# EAGLE board itead (EAGLE 6.6.0), part 1 of 2
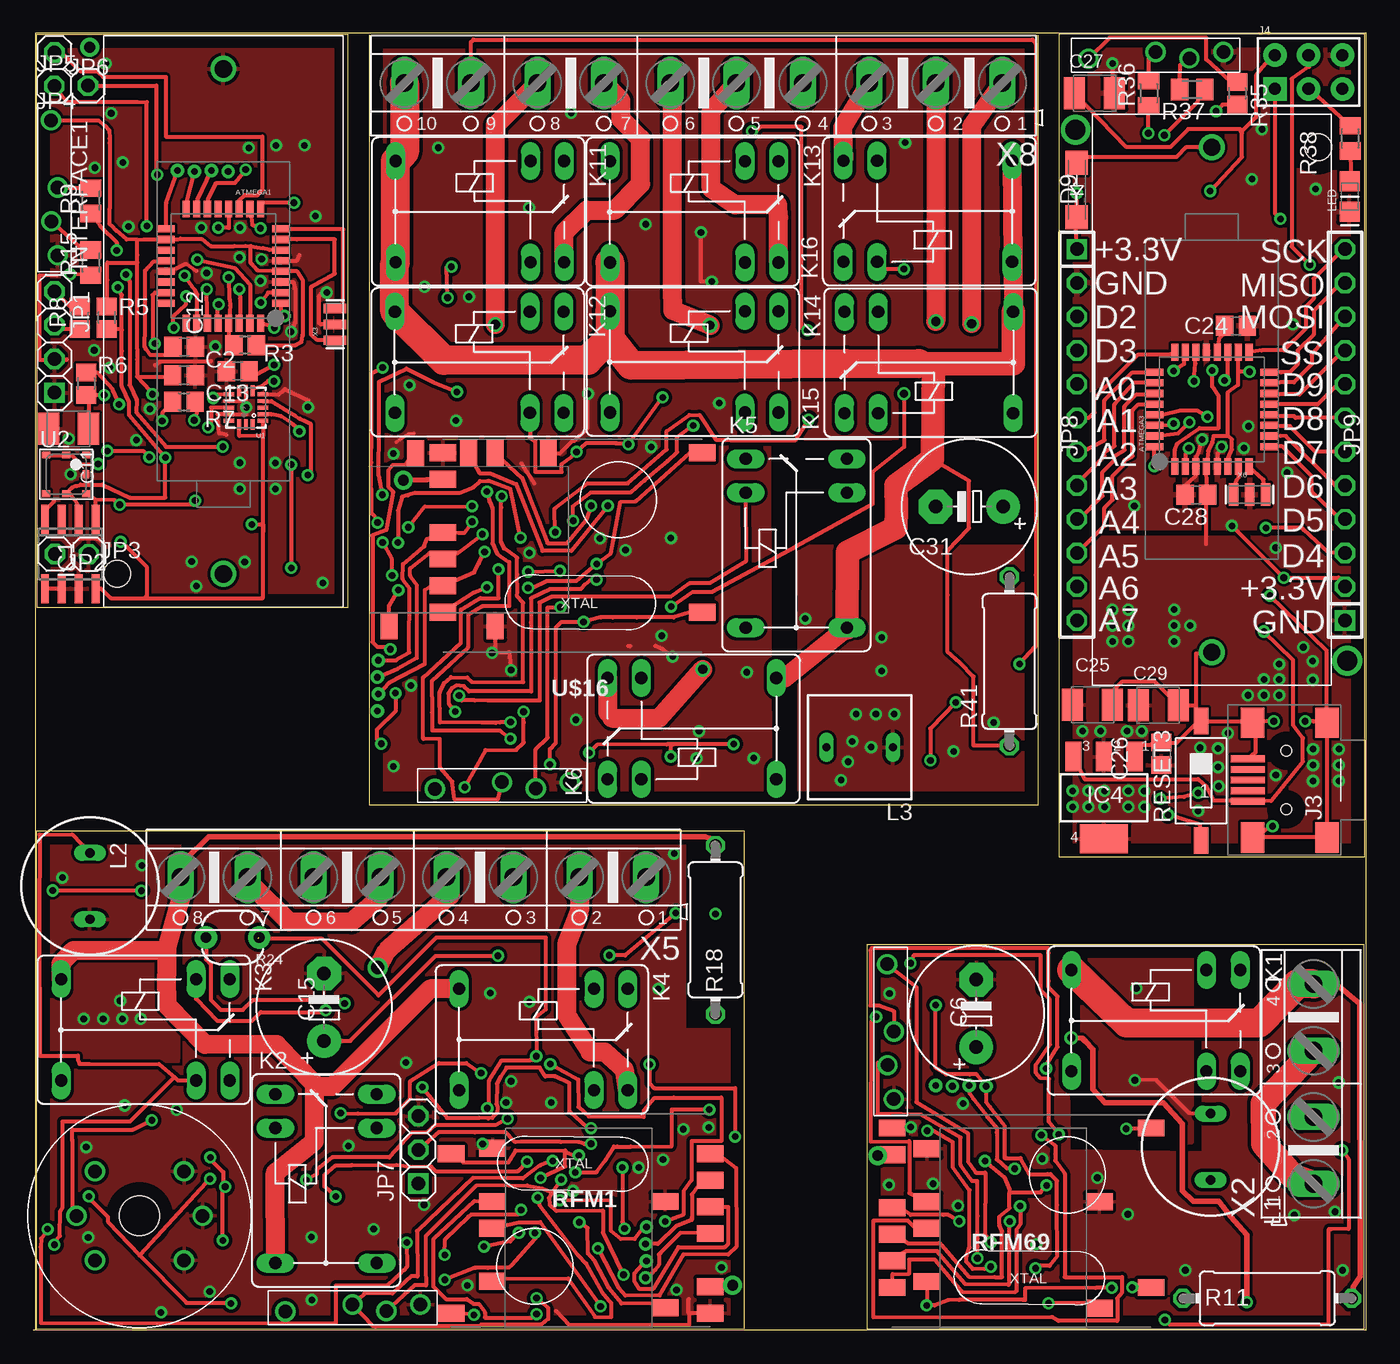
[diagram p0: board, top side]
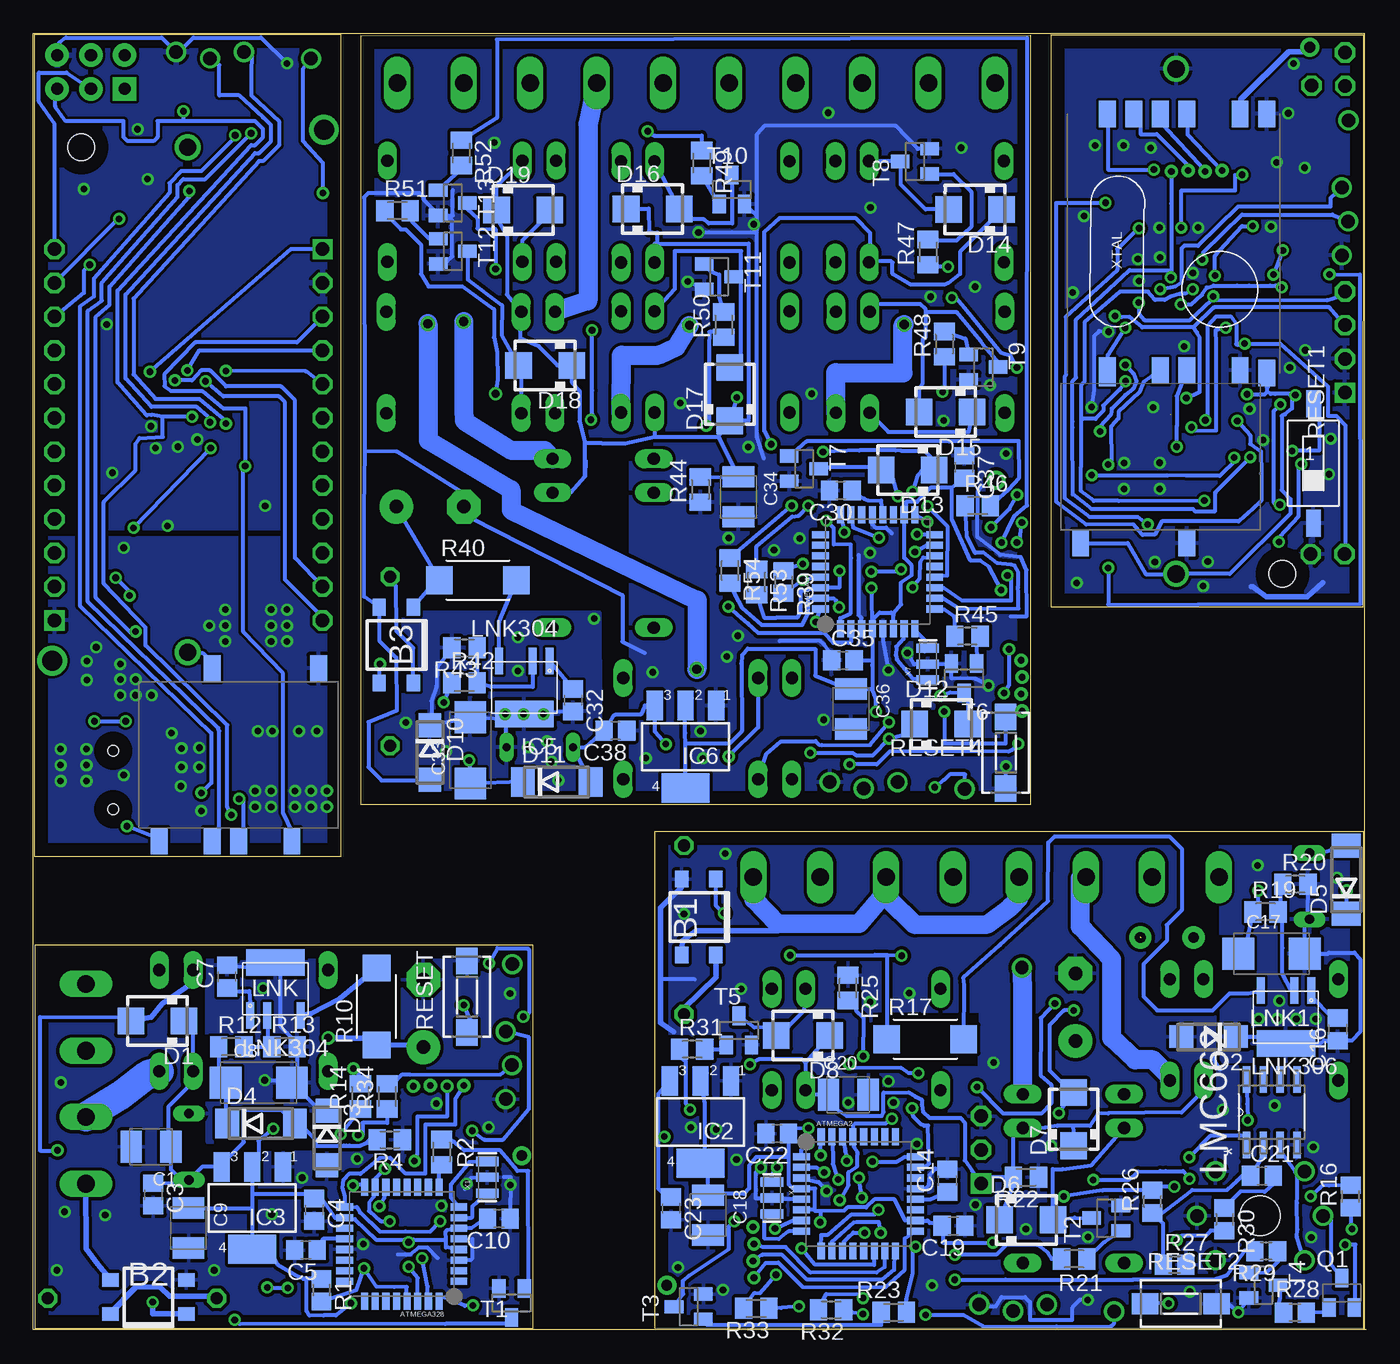
[diagram p1: board, bottom side, seen from below]

Size 100.36 x 97.58 mm. Coordinates in mm from the lower left corner, seen from the top.
Outline: 0,0 0.13,0
Outline: 0.13,0 100.36,0 100.36,97.57 0.13,97.57 0.13,0
Outline: 100.2,0.1 100.2,28.98 62.75,28.98 62.75,0.1 100.2,0.1
Outline: 23.7,97.47 0.25,97.45 0.25,54.38 23.7,54.38 23.7,60.45 23.72,70.61 23.7,97.47
Outline: 53.54,37.51 0.21,37.51 0.21,0.09 53.54,0.11 53.54,37.51
Outline: 77.2,35.6 100.25,35.6 100.25,97.5 77.2,97.5 77.2,35.6
Outline: 75.67,39.53 75.67,97.38 25.29,97.43 25.27,39.53 75.67,39.53
Copper layers (1*16): Top 0.035mm / dielectric 1.5mm / Bottom 0.035mm
Design rules "default": minimum track width 10mil, minimum drill 24mil, track to track 8mil, track to pad 8mil, pad to pad 8mil, via to via 8mil, smd to smd 8mil, copper to edge 40mil, drill to drill 8mil, minimum pad ring 10mil, minimum via ring 8mil, stop-mask expansion 4mil, vias tented up to drill 0mil, thermal gap 10mil
Net classes: 1 power: width 0.381 mm, clearance 0.254 mm; 2 220V: width 0.381 mm, clearance 0.508 mm

## Footprints (pad centres in the part's own frame; a part is rotated, then mirrored left to right if it is on the bottom)
TQFP32-08 = smd 1.27 x 0.533: 1 -4.293,2.8; 2 -4.293,2; 3 -4.293,1.2; 4 -4.293,0.4; 5 -4.293,-0.4; 6 -4.293,-1.2; 7 -4.293,-2; 8 -4.293,-2.8; 17 4.293,-2.8; 18 4.293,-2; 19 4.293,-1.2; 20 4.293,-0.4; 21 4.293,0.4; 22 4.293,1.2; 23 4.293,2; 24 4.293,2.8 | smd 0.533 x 1.27: 9 -2.8,-4.293; 10 -2,-4.293; 11 -1.2,-4.293; 12 -0.4,-4.293; 13 0.4,-4.293; 14 1.2,-4.293; 15 2,-4.293; 16 2.8,-4.293; 25 2.8,4.293; 26 2,4.293; 27 1.2,4.293; 28 0.4,4.293; 29 -0.4,4.293; 30 -1.2,4.293; 31 -2,4.293; 32 -2.8,4.293
TO-269AA = smd 1 x 1.25: + -1.28,-2.855; - 1.28,-2.855; AC1 -1.28,2.855; AC2 1.28,2.855
SMC_B = smd 1.6 x 2.4: + -1.5,0; - 1.5,0
C2012 = smd 1.3 x 1.5: 1 -0.85,0; 2 0.85,0
E5-10,5 = drill 1.016 pad 2.54: + -2.54,0 | drill 1.016 pad 2.54 octagon: - 2.54,0
SMC_C = smd 2.4 x 2.4: + -2.5,0; - 2.5,0
SMA = smd 2 x 2: A 2,0; C -2,0
DO214AC = smd 1.8 x 1.7: A 2.05,0; C -2.05,0
DO214AA = smd 1.8 x 2.2: A 2.55,0; C -2.55,0
SMA-DO214AC = smd 1.8 x 1.7: A -2.05,0; K 2.05,0
SO08 = smd 0.6 x 2.2: 1 -1.905,-2.6; 2 -0.635,-2.6; 3 0.635,-2.6; 4 1.905,-2.6; 5 1.905,2.6; 6 0.635,2.6; 7 -0.635,2.6; 8 -1.905,2.6
SOT223 = smd 1.219 x 2.235: 1 -2.311,-3.099; 2 0,-3.099; 3 2.311,-3.099 | smd 3.6 x 2.2: 4 0,3.099
SO-8C = smd 0.6 x 2: BP -1.905,-2; D 1.905,-2; FB -0.635,-2 | smd 4.41 x 2: S 0,2
PINHD1X05-SQUARE = drill 1.016: 1 -5.061,-0.269; 3 0,0.24; 4 2.54,-0.24; 5 5.099,0.24
USB-MINI-B_2 = smd 0.508 x 2.54: 1 0,0; 2 0.8,0; 3 1.6,0; 4 2.4,0; 5 3.2,0 | smd 2.286 x 1.778: 6 -2.717,5.948; 7 -2.717,0.36; 8 5.918,0.36; 9 5.918,5.948 | hole 0.813: -0.6,2.9; 3.8,2.9
HEAD3X2 = drill 0.914 pad 1.778 square: 1 0,0 | drill 0.914 pad 1.778: 2 0,2.54; 3 2.54,0; 4 2.54,2.54; 5 5.08,0; 6 5.08,2.54
1X04-S = drill 1.016 square: 1 -3.81,0 | drill 1.016 octagon: 2 -1.27,0; 3 1.27,0; 4 3.81,0
1X01 = drill 1.016 octagon: 1 0,0
1X03-S = drill 1.016 square: 1 -2.54,0 | drill 1.016 octagon: 2 0,0; 3 2.54,0
1X12 = drill 1.016 square: 1 -13.97,0 | drill 1.016 octagon: 2 -11.43,0; 3 -8.89,0; 4 -6.35,0; 5 -3.81,0; 6 -1.27,0; 7 1.27,0; 8 3.81,0; 9 6.35,0; 10 8.89,0; 11 11.43,0; 12 13.97,0
FRS1B = drill 0.914 long: 1 0,3.81; 2 0,-3.81; O -2.54,-3.81; P 10.16,3.81; P@ 10.16,-3.81; S -2.54,3.81
BS11 = drill 0.7 long: 1 -2.5,0; 2 2.5,0
SD8 = drill 0.6 long: 1 -2.5,0; 2 2.5,0
LED0805 = smd 1.524 x 1.524: 1 0,0; 2 2.286,0
SOIC127P600X175-8N = smd 1.981 x 0.559: 1 -2.464,1.905; 2 -2.464,0.635; 3 -2.464,-0.635; 4 -2.464,-1.905; 5 2.464,-1.905; 6 2.464,-0.635; 7 2.464,0.635; 8 2.464,1.905
SOT23-BEC = smd 1 x 1.4: B -0.95,-1.1; C 0,1.1; E 0.95,-1.1
R2012 = smd 1.3 x 1.5: 1 -0.85,0; 2 0.85,0
M2012 = smd 1.3 x 1.6: 1 -0.95,0; 2 0.95,0
R2512W = smd 2 x 2.1: 1 -2.896,0; 2 2.896,0
0411/12 = drill 0.914 octagon: 1 -6.35,0; 2 6.35,0
PHOTOCELL = drill 0.8 pad 1.676: 1 -2,0; 2 2,0
DTSM-3 = smd 2 x 1.6: 1 -2.7,0; 2 2.7,0
SMS-001 = smd 1.092 x 2.007: 1 0,-4.496; 2 0,4.496
RFM69W = smd 2 x 1.27: ANA 9.27,-5; DIO0 -10.23,5; GND 9.27,-7; MISO 9.27,1; MOSI 9.27,3; NSS 9.27,5; SCK 9.27,-1; VDD -10.23,-7
SOT23 = smd 1 x 1.4: 1 -0.95,-1.1; 2 0.95,-1.1; 3 0,1.1
QFN-16_0.5MM = smd 0.8 x 0.3: 1 -1.275,1; 2 -1.275,0.5; 3 -1.275,0; 4 -1.275,-0.5; 5 -1.275,-1; 9 1.275,-1; 10 1.275,-0.5; 11 1.275,0; 12 1.275,0.5; 13 1.275,1 | smd 0.3 x 0.8: 6 -0.5,-1.275; 7 0,-1.275; 8 0.5,-1.275; 14 0.5,1.275; 15 0,1.275; 16 -0.5,1.275
BMP180 = smd 0.6 x 0.5: 1 1.5,1.45; 2 0,1.45; 3 -1.5,1.45; 4 -1.5,-1.45; 5 0,-1.45; 6 1.5,-1.45 | smd 0.5 x 0.6: 7 1.5,0
RFM12B-ANTENNA = drill 0.8 pad 1.422: P$1 0,0
AVRHEADER = drill 0.5: CLK 2.54,0; MISO 1.27,0.07; MOSI 0,0; VPP -1.27,0.072
KEYSTONE-2/3A = drill 1.3: +VE 0,19; -VE 0,-19 | hole 2: 8,19
ESP03 = smd 1.27 x 2: WIFI_EN 3.27,-6; WIFI_GND -6.73,-6; WIFI_GPIO15 -2.73,7; WIFI_RX -0.73,-6; WIFI_TX -2.73,-6; WIFI_VDD 5.27,7
MQ-3 = drill 1.016: A1 -3.35,3.35; A2 -3.35,-3.35; B1 3.35,3.35; B2 3.35,-3.35; HA -4.75,0; HB 4.75,0 | hole 3: 0,0
RFM69W-MINPADS = smd 2 x 1.27: ANA 8,-5; DIO0 -11.5,5; GND 8,-7; MISO 8,1; MOSI 8,3; NSS 8,5; SCK 8,-1; VDD -11.5,-7
RESONATOR-SMD = smd 0.7 x 1.7: 1 -1.2,0; 2 0,0; 3 1.2,0
AK500/4 = drill 1.321 long: 1 -7.518,0; 2 -2.489,0; 3 2.489,0; 4 7.518,0
AK500/8 = drill 1.321 long: 1 -17.526,0; 2 -12.497,0; 3 -7.518,0; 4 -2.489,0; 5 2.489,0; 6 7.518,0; 7 12.497,0; 8 17.526,0
AK500/10 = drill 1.321 long: 1 -22.504,0; 2 -17.501,0; 3 -12.497,0; 4 -7.493,0; 5 -2.489,0; 6 2.489,0; 7 7.493,0; 8 12.497,0; 9 17.501,0; 10 22.504,0

## Placement (x,y rotation side)
ATMEGA1  ATMega-328  [TQFP32-08]  14.32,80.05 180 top
ATMEGA2  ATMega-328  [TQFP32-08]  38.23,10.23 0 bottom
ATMEGA3  ATMega-328  [TQFP32-08]  88.73,69.26 90 top
ATMEGA4  ATMega-328  [TQFP32-08]  36.79,57.04 90 bottom
ATMEGA328  ATMega-328  [TQFP32-08]  72.61,6.45 180 bottom
B1  RECT  [TO-269AA]  50.26,31.07 180 bottom
B2  RECT  [TO-269AA]  91.68,2.48 90 bottom
B3  RECTIFIER  [TO-269AA]  73.03,51.52 180 bottom
C1  100uF  [SMC_B]  91.48,13.77 180 bottom
C2  100nF  [C2012]  11.36,71.84 0 top
C3  0.1  [C2012]  91.31,10.19 270 bottom
C4  0.1  [C2012]  79.19,9.03 270 bottom
C5  0.1  [C2012]  79.83,6.01 180 bottom
C6  3,3uF  [E5-10,5]  70.99,23.81 90 top
C7  100nF  [C2012]  85.76,26.58 90 bottom
C8  22uF / 16 V  [SMC_C]  83.38,18.59 0 bottom
C9  100uF  [SMC_B]  88.67,7.66 270 bottom
C10  100nF  [C2012]  65.31,8.37 180 bottom
C11  100uF  [SMC_B]  2.66,67.8 180 top
C12  0.1  [C2012]  11.37,73.97 0 top
C13  100nF  [C2012]  15.4,72.14 180 top
C14  100nF  [C2012]  31.53,11.23 90 bottom
C15  3,3uF  [E5-10,5]  21.89,24.28 90 top
C16  100nF  [C2012]  2.15,22.61 270 bottom
C17  22uF / 16 V  [SMC_C]  7.13,28.3 0 bottom
C18  100uF  [SMC_B]  49.57,8.63 270 bottom
C19  100nF  [C2012]  31.07,7.83 180 bottom
C20  100uF  [SMC_B]  38.99,17.69 0 bottom
C21  100nF  [C2012]  7.86,11.59 0 bottom
C22  100nF  [C2012]  44.35,14.77 180 bottom
C23  100nF  [C2012]  52.33,9.14 270 bottom
C24  0.1  [C2012]  90.54,75.56 0 top
C25  100uF  [SMC_B]  79.74,47.03 0 top
C26  100nF  [C2012]  84.94,43.35 270 top
C27  100uF  [SMC_B]  79.89,93.07 0 top
C28  0.1  [C2012]  87.56,62.84 180 top
C29  100uF  [SMC_B]  84.7,47 0 top
C30  0.1  [C2012]  39.56,63.16 180 bottom
C31  3,3uF  [E5-10,5]  70.48,61.95 180 top
C32  100nF  [C2012]  59.71,47.38 270 bottom
C33  22uF / 16 V  [SMC_C]  67.45,43.61 90 bottom
C34  100uF  [SMC_B]  47.26,62.69 270 bottom
C35  100nF  [C2012]  39.4,50.38 0 bottom
C36  100uF  [SMC_B]  38.81,46.72 270 bottom
C37  100nF  [C2012]  30.27,64.93 270 bottom
C38  100nF  [C2012]  56.53,45.09 180 bottom
D1  MBRA340T3  [SMA]  91.01,23.24 180 bottom
D2  ES1D  [DO214AC]  11.87,22.06 180 bottom
D3  ES1D  [DO214AC]  78.26,14.44 270 bottom
D4  1N4007GP  [DO214AA]  83.21,15.53 0 bottom
D5  1N4007GP  [DO214AA]  1.5,33.87 90 bottom
D6  MBRA340T3  [SMA]  25.59,8.28 0 bottom
D7  MBRA340T3  [SMA]  22.03,15.85 90 bottom
D8  MBRA340T3  [SMA]  42.41,22.16 180 bottom
D9  GF1  [SMA-DO214AC]  78.56,85.79 270 top
D10  ES1D  [DO214AC]  70.51,43.44 270 bottom
D11  1N4007GP  [DO214AA]  60.95,41.23 0 bottom
D12  MBRA340T3  [SMA]  31.99,45.58 0 bottom
D13  MBRA340T3  [SMA]  34.52,64.71 180 bottom
D14  MBRA340T3  [SMA]  29.45,84.31 180 bottom
D15  MBRA340T3  [SMA]  31.67,69.06 180 bottom
D16  MBRA340T3  [SMA]  53.73,84.35 0 bottom
D17  MBRA340T3  [SMA]  47.92,70.41 90 bottom
D18  MBRA340T3  [SMA]  61.82,72.58 180 bottom
D19  MBRA340T3  [SMA]  63.48,84.27 0 bottom
IC1  LM75AD  [SO08]  2.79,58.38 180 top
IC2  MC33269ST-3.3T3  [SOT223]  50.13,15.63 180 bottom
IC3  MC33269ST-3.3T3  [SOT223]  83.87,9.16 180 bottom
IC4  MC33269ST-3.3T3  [SOT223]  80.61,40.05 180 top
IC5  LNK304  [SO-8C]  63.39,48.33 180 bottom
IC6  MC33269ST-3.3T3  [SOT223]  51.25,43.88 180 bottom
INTERFACE  PINHD1X5SQUARE  [PINHD1X05-SQUARE]  64.55,22.46 270 top
INTERFACE1  PINHD1X5SQUARE  [PINHD1X05-SQUARE]  1.6,85.96 270 top
INTERFACE2  PINHD1X5SQUARE  [PINHD1X05-SQUARE]  24.05,1.66 0 top
INTERFACE3  PINHD1X5SQUARE  [PINHD1X05-SQUARE]  84.5,95.93 0 top
J3  USB-MINI-B%C  [USB-MINI-B_2]  91.44,42.97 270 top
J4  HEAD3X2  [HEAD3X2]  93.47,93.39 0 top
JP1  [1X04-S]  1.6,74.34 90 top
JP2  [1X01]  1.64,58.38 180 top
JP3  [1X01]  4.19,58.37 180 top
JP4  [1X01]  1.58,93.61 180 top
JP5  [1X01]  1.59,96.13 180 top
JP6  [1X01]  4.13,93.63 180 top
JP7  [1X03-S]  29,13.55 90 top
JP8  [1X12]  78.57,67.35 270 top
JP9  [1X12]  98.75,67.35 90 top
JP10  PINHD1X5SQUARE  [PINHD1X05-SQUARE]  35.29,40.97 0 top
K1  FRS1B  [FRS1B]  88.32,23.27 180 top
K2  FRS1B  [FRS1B]  22.05,15.19 270 top
K3  FRS1B  [FRS1B]  12.26,22.58 180 top
K4  FRS1B  [FRS1B]  42.22,21.85 180 top
K5  FRS1B  [FRS1B]  57.45,63 270 top
K6  FRS1B  [FRS1B]  45.78,45.24 0 top
K11  FRS1B  [FRS1B]  37.43,84.15 180 top
K12  FRS1B  [FRS1B]  37.39,72.81 180 top
K13  FRS1B  [FRS1B]  53.57,84.13 180 top
K14  FRS1B  [FRS1B]  53.58,72.85 180 top
K15  FRS1B  [FRS1B]  63.61,72.79 0 top
K16  FRS1B  [FRS1B]  63.53,84.18 0 top
L1  680uH  [BS11]  88.62,13.78 270 top
L2  680uH  [BS11]  4.27,33.39 90 top
L3  680uH  [SD8]  62.23,43.85 180 top
LED  L_AMBER  [LED0805]  99.11,84.14 90 top
LMC662  LMV722IDR  [SOIC127P600X175-8N]  7.12,16.38 90 bottom
LNK  LNK304  [SO-8C]  82.12,25.66 0 bottom
LNK1  LNK306  [SO-8C]  6.05,23.53 180 bottom
Q1  BC327SMD  [SOT23-BEC]  1.85,2.79 0 bottom
R1  10k  [R2012]  78.66,2.99 270 bottom
R2  1 K  [M2012]  69.61,13.38 90 bottom
R3  10k  [R2012]  15.95,74.1 180 top
R4  1K  [M2012]  73.51,14.31 180 bottom
R5  10k  [R2012]  5.54,76.17 90 top
R6  10k  [R2012]  3.99,71.2 270 top
R7  10k  [R2012]  11.35,69.85 0 top
R8  10k  [R2012]  3.51,76.17 90 top
R9  1 K  [M2012]  4.34,84.97 90 top
R10  100  [R2512W]  74.51,24.33 90 bottom
R11  8,2  [0411/12]  92.9,2.36 180 top
R12  3.9 k  [M2012]  85.45,21.3 0 bottom
R13  2,05 k  [M2012]  81.44,21.31 0 bottom
R14  1 K  [M2012]  75.73,17.56 90 bottom
R15  1 K  [M2012]  4.34,80.32 90 top
R16  10k  [R2012]  1.18,10.03 90 bottom
R17  100  [R2512W]  33.2,21.88 0 bottom
R18  8,2  [0411/12]  51.35,30.1 270 top
R19  5.1 k  [M2012]  7.59,31.45 0 bottom
R20  2,05 k  [M2012]  5.34,33.53 0 bottom
R21  1 K  [M2012]  21.99,5.34 0 bottom
R22  1K  [M2012]  25.62,11.49 180 bottom
R23  1 K  [M2012]  35.56,1.32 180 bottom
R24  PHOTOCELLPTH  [PHOTOCELL]  15.01,29.53 0 top
R25  10 K  [M2012]  39.02,25.73 270 bottom
R26  10k  [R2012]  16.1,9.65 90 bottom
R27  2k  [R2012]  14.43,4.91 0 bottom
R28  10k  [R2012]  5.37,1.3 180 bottom
R29  1k  [R2012]  7.54,5.92 180 bottom
R30  1k  [R2012]  10.67,8.31 270 bottom
R31  1 K  [M2012]  50.75,21.12 0 bottom
R32  1 K  [M2012]  40.29,1.51 180 bottom
R33  1 K  [M2012]  45.92,1.62 180 bottom
R34  1 K  [M2012]  73.71,17.56 90 bottom
R35  10k  [R2012]  90.64,93.06 270 top
R36  1 K  [M2012]  83.97,93.06 90 top
R37  1 K  [M2012]  87.25,93.35 180 top
R38  220  [M2012]  99.15,89.66 270 top
R39  10k  [R2012]  43.87,56.28 270 bottom
R40  100  [R2512W]  66.88,56.42 0 bottom
R41  8,2  [0411/12]  73.5,50.31 90 top
R42  3.9 k  [M2012]  67.9,48.7 0 bottom
R43  2,05 k  [M2012]  67.89,51.33 180 bottom
R44  1K  [M2012]  50.13,63.23 90 bottom
R45  1 K  [M2012]  30.03,52.19 0 bottom
R46  1 K  [M2012]  29.25,62.02 0 bottom
R47  1 K  [M2012]  32.99,81.11 90 bottom
R48  1 K  [M2012]  31.76,74.18 90 bottom
R49  1 K  [M2012]  50.02,87.81 270 bottom
R50  1 K  [M2012]  48.37,75.64 90 bottom
R51  1 K  [M2012]  72.93,84.22 0 bottom
R52  1 K  [M2012]  68.12,88.56 270 bottom
R53  1 K  [M2012]  45.89,56.28 270 bottom
R54  1 K  [M2012]  47.9,57.13 270 bottom
RESET  RESET  [DTSM-3]  67.7,25.07 90 bottom
RESET1  [SMS-001]  3.99,65.2 180 bottom
RESET2  RESET  [DTSM-3]  13.96,1.97 0 bottom
RESET3  [SMS-001]  87.91,41.32 0 top
RESET4  [DTSM-3]  27.14,43.43 270 bottom
RFM1  RFM69W  [RFM69W]  41.69,8.25 0 top
RFM69  RFM69W  [RFM69W]  73.92,8.19 180 top
T1  BC846  [SOT23]  64.34,2.02 180 bottom
T2  BC846  [SOT23]  19.58,8.41 90 bottom
T3  BC846  [SOT23]  51.01,1.74 90 bottom
T4  BC846  [SOT23]  7.75,3.35 270 bottom
T5  BC846  [SOT23]  47.23,22.54 0 bottom
T6  BC846  [SOT23]  30.28,49.03 180 bottom
T7  BC846  [SOT23]  42.33,64.8 270 bottom
T8  BC846  [SOT23]  33.98,87.93 90 bottom
T9  BC846  [SOT23]  28.83,72.45 270 bottom
T10  BC846  [SOT23]  47.76,85.81 0 bottom
T11  BC846  [SOT23]  48.72,79.25 270 bottom
T12  BC846  [SOT23]  68.77,81.16 270 bottom
T13  BC846  [SOT23]  68.78,84.81 270 bottom
U1  MMA8452Q  [QFN-16_0.5MM]  16.01,69.4 180 top
U2  BMP180  [BMP180]  2.48,64.38 0 top
U$1  RFM12B_ANTENNA  [RFM12B-ANTENNA]  63.57,13.11 90 top
U$2  AVRHEADERDIP  [AVRHEADER]  70.47,18.4 180 top
U$3  RFM12B_ANTENNA  [RFM12B-ANTENNA]  4.26,96.52 180 top
U$4  AVRHEADERDIP  [AVRHEADER]  13.41,87.24 180 top
U$5  BATT-CR123A  [KEYSTONE-2/3A]  14.32,75.89 180 top
U$6  RFM69W  [RFM69W]  14.5,82.23 90 bottom
U$7  ESP03  [ESP03]  16.23,66.21 180 bottom
U$8  RFM12B_ANTENNA  [RFM12B-ANTENNA]  52.65,3.35 180 top
U$9  ESP03  [ESP03]  73.28,6.9 270 top
U$10  AVRHEADERDIP  [AVRHEADER]  46.1,6.46 270 top
U$11  METHANE_SENSOR  [MQ-3]  8,8.58 180 top
U$12  ESP03  [ESP03]  40.57,6.92 270 top
U$13  BATT-CR123A  [KEYSTONE-2/3A]  88.73,69.99 0 top
U$14  ESP03  [ESP03]  84.15,42.77 0 bottom
U$15  RFM12B_ANTENNA  [RFM12B-ANTENNA]  27.86,63.94 90 top
U$16  RFM69  [RFM69W-MINPADS]  38.85,59 180 top
U$17  AVRHEADERDIP  [AVRHEADER]  25.99,47.84 90 top
U$18  ESP03  [ESP03]  32.05,59.96 180 top
X1  16 MHz  [RESONATOR-SMD]  66.18,11.48 90 bottom
X2  [AK500/4]  96.39,18.51 90 top
X3  16 MHz  [RESONATOR-SMD]  22.72,75.67 90 top
X4  16 MHz  [RESONATOR-SMD]  44.74,9.92 270 bottom
X5  [AK500/8]  28.63,34.06 180 top
X6  16 MHz  [RESONATOR-SMD]  91.57,62.85 0 top
X7  16 MHz  [RESONATOR-SMD]  33.01,50.09 90 bottom
X8  [AK500/10]  50.45,93.82 180 top

## Library data of the parts
ATMEGA1-ATMEGA4 ATMEGA328 U$1 U$3 U$8 U$15 U$16 = LowPowerLab
B1-B3 = rectifier
C1-C38 R1-R23 R25-R54 = resistor
D1-D19 = diode
IC1 = i2c
IC2-IC4 IC6 = linear
IC5 LNK LNK1 = powerint
INTERFACE INTERFACE1-INTERFACE3 JP10 U$5 U$13 = eagle-library-edeca.net-v5
J3 J4 = MyCON2
JP1-JP7 = pinhead-2
JP8 JP9 = pinhead
K1-K6 K11-K16 = relay; OC_FARNELL: unknown; OC_NEWARK: unknown
L1-L3 = inductor-neosid; OC_FARNELL: unknown; OC_NEWARK: unknown
LED = MySMD
LMC662 = Texas Instruments_By_element14_Batch_1; MPN: LMV722IDR; OC_FARNELL: -; OC_NEWARK: 02M3640; PACKAGE: SOIC-8; SUPPLIER: Texas Instruments
Q1 = transistor-pnp
R24 U2 U$11 = SparkFun-Sensors
RESET RESET2 RESET4 = switch-tact
RESET1 RESET3 = smd-special
RFM1 RFM69 U$2 U$4 U$6 U$7 U$9 U$10 U$12 U$14 U$17 U$18 = RemoteHome
T1-T13 = transistor
U1 = SparkFun-Sensors; PROD_ID: IC-10769
X1 X3 X4 X6 X7 = SparkFun
X2 X5 X8 = con-ptr500; OC_FARNELL: unknown; OC_NEWARK: unknown

## Nets
5V1: C27.+ IC4.3 J3.5 J4.2
5V2: C1.+ C3.1 D1.C D4.A IC3.3 K1.1 L1.2 R4.2
5V3: C34.+ C38.2 D11.A D12.C D13.C D14.C D15.C D16.C D17.C D18.C D19.C IC6.3 K5.1 K6.1 K11.1 K12.1 K13.1 K14.1 K15.1 K16.1 L3.2 R44.2
6V: C20.+ C23.1 D5.A D6.C D7.C D8.C IC2.3 JP7.1 K2.1 K3.1 K4.1 L2.2 Q1.E R22.2
A0: ATMEGA328.23
A1: ATMEGA328.24
A2: ATMEGA328.25
A3: ATMEGA328.26
A4: ATMEGA1.22
A4_SDA: ATMEGA328.27
A4_SDA1: ATMEGA1.27 IC1.1 R6.1 U1.6 U2.6
A4_SDA2: ATMEGA2.27
A4_SDA3: ATMEGA3.27 JP8.9
A4_SDA4: ATMEGA4.27
A5: ATMEGA1.19
A5_SCL: ATMEGA328.28
A5_SCL1: ATMEGA1.28 IC1.2 R5.1 U1.4 U2.5
A5_SCL2: ATMEGA2.28
A5_SCL3: ATMEGA3.28 JP8.10
A5_SCL4: ATMEGA4.28
A6: ATMEGA328.19
A7: ATMEGA328.22
A8: ATMEGA1.26 JP4.1
A9: ATMEGA1.25
A10: ATMEGA1.24
A11: ATMEGA1.23 JP2.1 R7.2
A12: ATMEGA2.22
A13: ATMEGA2.19
A14: ATMEGA2.26
A15: ATMEGA2.25
A16: ATMEGA2.24 LMC662.1 R26.2 R30.2
A17: ATMEGA2.23 R24.2 R25.2
A18: ATMEGA3.22 JP8.12
A19: ATMEGA3.19 JP8.11
A20: ATMEGA3.26 JP8.8
A21: ATMEGA3.25 JP8.7
A22: ATMEGA3.24 JP8.6
A23: ATMEGA3.23 JP8.5
A24: ATMEGA4.22
A25: ATMEGA4.19
A26: ATMEGA4.26
A27: ATMEGA4.25
A28: ATMEGA4.24 R49.1
A29: ATMEGA4.23 R52.1
AREF1: ATMEGA1.20 C12.1
AREF2: ATMEGA2.20 C14.1
AREF3: ATMEGA328.20 C5.1
AREF4: ATMEGA3.20 C24.1
AREF5: ATMEGA4.20 C30.1
D0_RX1: ATMEGA1.30 INTERFACE1.3 R9.2
D0_RX2: ATMEGA2.30 INTERFACE2.3 R32.2
D0_RX3: ATMEGA328.30 INTERFACE.3 R14.2
D0_RX4: ATMEGA3.30 INTERFACE3.3 R36.2
D0_RX5: ATMEGA4.30 JP10.3 R53.2
D1: ATMEGA1.13
D1_TX1: ATMEGA1.31 INTERFACE1.4 R15.2
D1_TX2: ATMEGA2.31 INTERFACE2.4 R33.2
D1_TX3: ATMEGA328.31 INTERFACE.4 R34.2
D1_TX4: ATMEGA3.31 INTERFACE3.4 R37.2
D1_TX5: ATMEGA4.31 JP10.4 R54.2
D3: ATMEGA328.13
D4: ATMEGA328.9 R2.1
D6: ATMEGA328.10
D7: ATMEGA328.11
D8: ATMEGA328.12
D10: ATMEGA1.12 JP6.1
D10_SS1: ATMEGA1.14 U$6.NSS
D10_SS2: ATMEGA2.14 RFM1.NSS
D10_SS3: ATMEGA328.14 RFM69.NSS
D10_SS4: ATMEGA3.14 JP9.9
D10_SS5: ATMEGA4.14 U$16.NSS
D11: ATMEGA1.11 JP5.1
D11_MOSI1: ATMEGA1.15 U$4.MOSI U$6.MOSI
D11_MOSI2: ATMEGA2.15 RFM1.MOSI U$10.MOSI
D11_MOSI3: ATMEGA328.15 RFM69.MOSI U$2.MOSI
D11_MOSI4: ATMEGA3.15 J4.4 JP9.10
D11_MOSI5: ATMEGA4.15 U$16.MOSI U$17.MOSI
D12: ATMEGA1.10 IC1.8 U1.1 U1.14 U2.2 U2.3
D12_MISO1: ATMEGA1.16 U$4.MISO U$6.MISO
D12_MISO2: ATMEGA2.16 RFM1.MISO U$10.MISO
D12_MISO3: ATMEGA328.16 RFM69.MISO U$2.MISO
D12_MISO4: ATMEGA3.16 J4.1 JP9.11
D12_MISO5: ATMEGA4.16 U$16.MISO U$17.MISO
D13: ATMEGA1.9 R7.1
D13_SCK1: ATMEGA1.17 U$4.CLK U$6.SCK
D13_SCK2: ATMEGA2.17 RFM1.SCK U$10.CLK
D13_SCK3: ATMEGA328.17 RFM69.SCK U$2.CLK
D13_SCK4: ATMEGA3.17 J4.3 JP9.12 R38.1
D13_SCK5: ATMEGA4.17 U$16.SCK U$17.CLK
D14: ATMEGA1.2 JP1.4 R8.2 U1.11
D15: ATMEGA1.1 JP1.3 R8.1 U1.9
D16: ATMEGA1.32 U$6.DIO0 U$7.WIFI_EN
D17: ATMEGA2.13
D18: ATMEGA2.12
D19: ATMEGA2.11 R29.2
D20: ATMEGA2.10 R23.1
D21: ATMEGA2.9 R21.1
D22: ATMEGA2.2 R31.1
D23: ATMEGA2.1 JP7.2
D24: ATMEGA2.32 RFM1.DIO0 U$12.WIFI_EN
D25: ATMEGA328.2
D26: ATMEGA328.1
D27: ATMEGA328.32 RFM69.DIO0 U$9.WIFI_EN
D28: ATMEGA3.13 JP9.8
D29: ATMEGA3.12 JP9.7
D30: ATMEGA3.11 JP9.6
D31: ATMEGA3.10 JP9.5
D32: ATMEGA3.9 JP9.4
D33: ATMEGA3.2 JP9.3
D34: ATMEGA3.1 JP8.4
D35: ATMEGA3.32 JP8.3 U$14.WIFI_EN
D36: ATMEGA4.13
D37: ATMEGA4.12 R48.1
D38: ATMEGA4.11 R47.1
D39: ATMEGA4.10 R46.1
D40: ATMEGA4.2 R51.1
D41: ATMEGA4.1 R50.1
D42: ATMEGA4.32 U$16.DIO0 U$18.WIFI_EN
D43: ATMEGA4.9 R45.1
FB1: LNK1.FB R19.2 R20.1
FB2: LNK.FB R12.2 R13.1
GND1: ATMEGA1.3 ATMEGA1.5 ATMEGA1.21 C2.2 C11.- C12.2 C13.2 IC1.4 IC1.5 IC1.6 IC1.7 INTERFACE1.5 JP1.1 JP1.2 JP3.1 RESET1.2 U1.5 U1.7 U1.10 U1.12 U2.7 U$5.-VE U$6.GND U$7.WIFI_GND U$7.WIFI_GPIO15 X3.2
GND2 [power]: ATMEGA2.3 ATMEGA2.5 ATMEGA2.21 B1.- C14.2 C15.- C18.- C19.1 C20.- C22.2 C23.2 D2.A IC2.1 INTERFACE2.5 JP7.3 LMC662.4 R22.1 R25.1 R27.2 RESET2.2 RFM1.GND T2.2 T3.2 T4.2 T5.2 U$11.A1 U$11.A2 U$11.HA U$12.WIFI_GND U$12.WIFI_GPIO15 X4.2
GND3 [power]: ATMEGA328.3 ATMEGA328.5 ATMEGA328.21 B2.- C1.- C3.2 C4.2 C5.2 C6.- C9.- C10.1 D3.A IC3.1 INTERFACE.5 R4.1 RESET.2 RFM69.GND T1.2 U$9.WIFI_GND U$9.WIFI_GPIO15 X1.2
GND4: ATMEGA3.3 ATMEGA3.5 ATMEGA3.21 C24.2 C25.- C26.1 C27.- C28.2 C29.- IC4.1 INTERFACE3.5 J3.1 J3.6 J3.7 J3.8 J3.9 J4.6 JP8.2 JP9.2 LED.1 RESET3.2 U$13.-VE U$14.WIFI_GND U$14.WIFI_GPIO15 X6.2
GND5 [power]: ATMEGA4.3 ATMEGA4.5 ATMEGA4.21 B3.- C30.2 C31.- C34.- C35.1 C36.- C37.1 C38.1 D10.A IC6.1 JP10.5 R44.1 RESET4.2 T6.2 T7.2 T8.2 T9.2 T10.2 T11.2 T12.2 T13.2 U$16.GND U$18.WIFI_GND U$18.WIFI_GPIO15 X7.2
N$4: ATMEGA328.7 X1.1
N$6: ATMEGA328.8 X1.3
N$10: ATMEGA1.7 X3.1
N$11: ATMEGA1.8 X3.3
N$12: U$3.P$1 U$6.ANA
N$14: RFM69.ANA U$1.P$1
N$16: C13.1 U1.2
N$17: R9.1 U$7.WIFI_TX
N$19: R15.1 U$7.WIFI_RX
N$22: ATMEGA2.7 X4.1
N$23: ATMEGA2.8 X4.3
N$24: RFM1.ANA U$8.P$1
N$25 [220V]: K2.P@ K3.P@ K4.P@ R18.1 X5.8
N$26 [220V]: B1.AC2 X5.1 X5.3 X5.5 X5.7
N$27 [220V]: K3.S X5.6
N$28 [220V]: LNK1.D R17.2
N$29 [220V]: B1.+ C15.+ R17.1
N$30 [220V]: B1.AC1 R18.2
N$31: C16.1 LNK1.BP
N$32: C17.+ D5.C R19.1
N$33: D6.A K2.2 T2.3
N$34: R21.2 T2.1
N$35: D7.A K3.2 T3.3
N$36: R23.2 T3.1
N$37 [220V]: K2.S X5.4
N$38: LMC662.3 U$11.B1 U$11.B2
N$39: LMC662.8 Q1.C U$11.HB
N$40: R29.1 T4.1
N$41: R28.2 T4.3
N$42: Q1.B R28.1
N$43: C21.1 LMC662.2 R26.1 R27.1
N$44: C21.2 R30.1
N$45 [220V]: K4.S X5.2
N$46: D8.A K4.2 T5.3
N$47: R31.2 T5.1
N$48 [220V]: K4.O
N$49: R32.1 U$12.WIFI_TX
N$50 [220V]: K3.O
N$51 [220V]: K2.O
N$52 [220V]: K2.P
N$53 [220V]: K3.P
N$54 [220V]: K4.P
N$55: R33.1 U$12.WIFI_RX
N$56: ATMEGA3.7 X6.1
N$57: ATMEGA3.8 X6.3
N$58 [220V]: K1.P@ R11.1 X2.4
N$59 [220V]: B2.AC2 X2.1 X2.3
N$60 [220V]: K1.S X2.2
N$61 [220V]: LNK.D R10.2
N$62 [220V]: B2.+ C6.+ R10.1
N$63 [220V]: B2.AC1 R11.2
N$64: C7.1 LNK.BP
N$65: C8.+ D4.C R12.1
N$66: D1.A K1.2 T1.3
N$67: R2.2 T1.1
N$68 [220V]: K1.P
N$69 [220V]: K1.O
N$70: R14.1 U$9.WIFI_TX
N$71: R34.1 U$9.WIFI_RX
N$72: R36.1 U$14.WIFI_TX
N$73: R37.1 U$14.WIFI_RX
N$74: D9.A U$13.+VE
N$75: LED.2 R38.2
N$78: ATMEGA4.7 X7.1
N$79: ATMEGA4.8 X7.3
N$80: U$15.P$1 U$16.ANA
N$81 [220V]: B3.AC2 X8.9
N$82 [220V]: K5.S X8.2
N$83 [220V]: IC5.D R40.2
N$84 [220V]: B3.+ C31.+ R40.1
N$85 [220V]: B3.AC1 R41.2
N$86: C32.1 IC5.BP
N$87: C33.+ D11.C R42.1
N$88: D12.A K5.2 T6.3
N$89: R45.2 T6.1
N$90: D13.A K6.2 T7.3
N$91: R46.2 T7.1
N$92 [220V]: K5.P@
N$93 [220V]: K6.P@
N$94 [220V]: K5.O
N$95 [220V]: K6.O
N$96: D14.A K11.2 T8.3
N$97: R47.2 T8.1
N$98: D15.A K12.2 T9.3
N$99: R48.2 T9.1
N$100: D16.A K13.2 T10.3
N$101: R49.2 T10.1
N$102: D17.A K14.2 T11.3
N$103: R50.2 T11.1
N$104: D18.A K15.2 T12.3
N$105: R51.2 T12.1
N$106: D19.A K16.2 T13.3
N$107: R52.2 T13.1
N$108 [220V]: K13.P@
N$109 [220V]: K15.P@
N$110 [220V]: K5.P K6.P K11.P K11.P@ K12.P@ K13.P K14.P@ K15.P K16.P K16.P@ R41.1 X8.10
N$111 [220V]: K11.O
N$112 [220V]: K12.O
N$113 [220V]: K13.O
N$114 [220V]: K14.O
N$115 [220V]: K15.O
N$116 [220V]: K16.S X8.3
N$117 [220V]: K13.S X8.5
N$118 [220V]: K14.S X8.6
N$119 [220V]: K15.S X8.4
N$120 [220V]: K16.O
N$121 [220V]: K12.P
N$122 [220V]: K14.P
N$123 [220V]: K12.S X8.8
N$124 [220V]: K11.S X8.7
N$125 [220V]: K6.S X8.1
N$126: R53.1 U$18.WIFI_TX
N$127: R54.1 U$18.WIFI_RX
RST1: ATMEGA1.29 R3.2 RESET1.1 U$4.VPP
RST2: ATMEGA2.29 R16.2 RESET2.1 U$10.VPP
RST3: ATMEGA328.29 R1.2 RESET.1 U$2.VPP
RST4: ATMEGA3.29 J4.5 R35.2 RESET3.1
RST5: ATMEGA4.29 R39.2 RESET4.1 U$17.VPP
S: C7.2 C8.- D3.C L1.1 LNK.S R13.2
S1: C16.2 C17.- D2.C L2.1 LNK1.S R20.2
S3: C32.2 C33.- D10.C IC5.S L3.1 R43.2
VCC1: ATMEGA1.4 ATMEGA1.6 ATMEGA1.18 C2.1 C11.+ INTERFACE1.1 R3.1 R5.2 R6.2 U$5.+VE U$6.VDD U$7.WIFI_VDD
VCC2: ATMEGA2.4 ATMEGA2.6 ATMEGA2.18 C18.+ C19.2 C22.1 IC2.2 IC2.4 INTERFACE2.1 R16.1 R24.1 RFM1.VDD U$12.WIFI_VDD
VCC3: ATMEGA328.4 ATMEGA328.6 ATMEGA328.18 C4.1 C9.+ C10.2 IC3.2 IC3.4 INTERFACE.1 R1.1 RFM69.VDD U$9.WIFI_VDD
VCC4: ATMEGA3.4 ATMEGA3.6 ATMEGA3.18 C25.+ C26.2 C28.1 C29.+ D9.K IC4.2 IC4.4 INTERFACE3.1 JP8.1 JP9.1 R35.1 U$14.WIFI_VDD
VCC5: ATMEGA4.4 ATMEGA4.6 ATMEGA4.18 C35.2 C36.+ C37.2 IC6.2 IC6.4 JP10.1 R39.1 U$16.VDD U$18.WIFI_VDD
XXX: IC5.FB R42.2 R43.1

## Tracks (layer width: path | path; a pad name or v marks a point on that pad's centre or on a via)
5V1  (via drill 0.5)
  Top 0.305: J4.2 93.24,95.89 92.05,94.4 92.05,91.25 91,90.2 90.85,90.35 | 90.85,90.35 86.95,90.35 85.6,89 82.3,89 C27.+ | IC4.3 79.15,41.45 87.7,41.45 88.3,40.9 88.85,39.85 91.2,39.85 J3.5 93.2,39.8 95.58,42.76 95.58,44.56 94.85,45.5 94.85,50.4 v92.65,52.55 | v88.6,85.7 91,88.25 91,90.05 90.85,90.35
  Bottom 0.305: v92.65,52.55 92.95,52.4 95.65,55.1 95.65,76.25 94.6,77.15 94.6,78.5 88.6,85.25 v88.6,85.7
5V2
  Bottom 0.305: D1.C 88.32,22.91 K1.1 88.32,18.65 90.19,16.78 90.19,14.22 | 90.19,14.22 90.19,13.98 C1.+ 89.98,12.06 89.2,11.28 L1.2 | 89.8,13.83 90.19,14.22 | L1.2 | L1.2 87.64,12.26 IC3.3 86.18,12.45 84.49,14.13 84.49,16.55 81.68,16.55 D4.A 80.33,15.53 79.11,14.32 79.1,13.86 77.33,13.86 76.95,13.86 76.77,13.86 76.56,13.86 75.74,13.86 75.25,14.07 74.46,14.86 R4.2 | C3.1 88.84,11.06 L1.2
5V3  (via drill 0.5)
  Top 0.305: v34.15,63.08 34.25,62.69 34.35,62.34 34.58,61.81 34.57,59.19 34.93,58.39 35.83,57.77 35.83,54.47 33.8,54.45 32.74,53.8 32.74,52.74 32.73,51.34 30.01,48.82 30.01,46.45 30.03,45.11 35.12,45.12 v35.92,44.49 | v47.39,70.17 v44.8,66.65 44.61,66.71 43.9,66.73 43.79,66.72 41.61,66.71 v40.9,66.07 40.54,65.71 39.77,65.16 39.79,64.57 38.01,64.57 37.8,64.57 37.78,66.87 37.38,67.1 K12.1 | v52.73,44.08 48.18,44.05 | 48.18,44.05 47.69,44.05 42.44,44.03 v41.85,43.41 | v48,43.15 48.03,44.02 48.18,44.05
  Bottom 0.305: v40.9,66.07 38.17,66.18 35.41,66.18 35.05,66.16 33.28,66.16 32.51,65.39 32.51,64.72 D13.C 31.97,64.66 33.47,64.66 33.78,64.29 v34.15,63.08 | D15.C 29.95,67.55 32.36,67.55 35.97,67.55 35.97,67.59 K12.1 | D14.C 27.5,84.2 30.58,81.12 30.58,79.44 31.47,78.77 31.75,78.66 33.2,78.66 34.27,78.66 35.67,79.47 35.67,80.32 35.76,80.41 37.36,80.41 K11.1 37.35,80.42 37.35,82.56 38.47,83.67 44.16,83.67 45.32,82.63 45.31,72.63 45.32,72.63 45.32,67.65 v44.8,66.65 | 53.58,67.21 48.8,67.2 | 48.8,67.2 48.65,67.41 | 48.65,67.41 47.95,68.41 D17.C | K13.1 53.57,81.73 53.38,81.73 | 53.38,81.73 46.5,81.73 46.5,68.41 D17.C | D16.C 54.02,84.38 54.01,82.63 53.38,82.58 53.38,81.73 | K16.1 65.48,86.04 D19.C 65.48,83.7 64.69,82.33 64.69,77.89 K15.1 63.67,76.55 63.67,74.48 63.64,74.56 62.3,74.04 60.89,72.57 60.71,72.57 D18.C 59.82,71.32 59.24,70.65 59.24,68.35 58.81,66.71 | K14.1 53.58,67.21 | 53.58,67.21 55.8,66.71 57.52,66.71 58.81,66.71 | v47.39,70.17 D17.C | 58.8,64.24 58.81,66.71 | 48.68,67.39 48.65,67.41 | 58.79,65.44 58.8,64.24 | K5.1 59.89,63 58.8,64.24 | D12.C 34.77,44.81 v35.92,44.49 37.18,43.21 38.12,43.21 38.34,43.21 38.65,43.4 41.56,43.4 41.77,43.47 v41.85,43.41 | 48.8,67.2 48.68,67.08 C34.+ R44.2 | D11.A L3.2 58.78,43.85 C38.2 57,45.62 56.68,46.2 56.5,46.29 54.61,46.29 54.31,46.97 IC6.3 53.57,45.04 v52.73,44.08 | K6.1 45.78,45.33 v48,43.15
6V  (via drill 0.5)
  Top 0.305: v1.59,6.4 1.52,6.4 2,7.08 2.02,8.91 2.21,9.24 2.2,15.68 7.29,15.68 10.61,19 10.64,19 | K3.1 10.88,18.77 10.64,19 | 3.36,20.63 0.48,20.63 0.48,20.88 0.49,20.88 0.46,30.74 0.48,37.27 2.93,37.28 L2.2 | 3.38,20.63 3.36,20.63 | 3.36,20.63 3.36,20.31 3.5,20.02 4.23,20.02 9.48,20 10.64,19 | v52.85,14.54 52.85,18.2 46.74,18.19 46.4,18.57 v46.4,19.97
  Bottom 0.305: Q1.E 0.82,1.83 0.82,6.42 1.59,6.42 v1.59,6.4 | R22.2 28.32,11.51 JP7.1 29.66,11.94 30.22,12.75 30.23,15.59 30.55,15.95 32.88,15.95 33.36,16.39 33.46,16.94 33.46,17.32 33.92,17.53 34.46,17.86 36.33,17.86 36.33,16.38 36.49,16.09 39.13,16.09 40.17,16.84 40.17,17.78 C20.+ 42.22,17.68 K4.1 | R22.2 26.57,14.55 K2.1 24.19,15.21 23.28,15.34 22.05,15.35 | D6.C 26.57,10.89 R22.2 | D5.A 3.23,35.91 L2.2 | K3.1 12.27,18.75 12.27,17.98 13.89,16.36 19.44,16.29 20.23,16.25 20.79,15.35 22.05,15.35 | C23.1 52.65,9.99 53.29,10.62 53.29,16.06 | 53.29,16.06 53.29,17.76 IC2.3 | v52.85,14.54 53.28,14.61 53.29,16.06 | D8.C 42.2,20.11 | 42.2,20.11 K4.1 | D7.C 22.03,14.88 22.05,15.35 | K4.1 42.22,18.77 | v46.4,19.97 45.75,20.35 42.45,20.35 42.2,20.11
A4_SDA1  (via drill 0.5)
  Top 0.305: ATMEGA1.27 13.08,76.49 v13.07,78.31 | U1.6 16.51,70.85 17.07,70.97 17.5,71.25 17.66,71.4 v18.13,71.39 | IC1.1 4.7,62.47 | 4.7,62.47 U2.6 | R6.1 4.81,72.05 5.97,70.78 6.02,70.65 v6.46,69.64 | 4.7,62.47 6.1,62.45 6.41,62.09 v6.51,62.09 12.11,62.09 v12.19,62.4
  Bottom 0.305: v13.07,78.31 13.67,77.98 14,77.96 14.77,77.74 15.18,77.51 15.91,77.5 16.44,78.13 18.54,78.12 21.21,75.81 21.2,71.36 21.48,71.07 21.48,68.67 | 21.48,68.67 21.48,64.96 21.48,63.12 20.52,62.38 18.66,62.38 12.51,62.37 12.45,62.39 v12.19,62.4 | v18.13,71.39 18.54,70.77 19.27,70.08 19.42,69.93 19.8,69.55 19.8,69.15 20.4,68.56 21.37,68.56 21.48,68.67 | v6.51,62.09 6.96,62.23 6.96,69.15 6.48,69.59 v6.46,69.64
A4_SDA3
  Top 0.305: JP8.9 78.75,61 80.5,62.75 80.5,64.55 81.4,65.45 81.4,65.75 82.15,66.2 82.15,69.5 83.05,70.4 84.27,70.4 ATMEGA3.27
A5_SCL1  (via drill 0.5)
  Top 0.305: ATMEGA1.28 13.89,76.86 v13.97,77.16 | U1.4 17.92,69.89 19.71,68.79 20.06,68.57 20.36,68.44 20.87,68.19 20.88,64.58 v20.67,64.32 | IC1.2 3.31,62.15 2.76,62.91 U2.5 2.9,63.35 3.21,63.49 3.56,63.6 5.21,63.6 7.27,62.63 9.95,62.63 v9.94,65.64 7.2,68.86 7.2,69.82 6.66,70.98 6.66,73.14 6.67,73.65 6.67,75.23 | 6.67,75.23 6.67,77.87 v6.37,78.45 | R5.1 6.62,75.32 6.67,75.23
  Bottom 0.305: v9.94,65.64 9.82,65.58 9.83,65.44 11.03,64.26 13.58,64.28 14.96,64.29 17.13,64.3 v20.67,64.32 | v13.97,77.16 13.18,77.17 12.36,77.88 12.02,78.43 11.51,78.58 9.74,78.58 8.82,78.57 7.25,78.57 6.83,78.57 v6.37,78.45
A5_SCL3
  Top 0.305: JP8.10 78.76,58.61 80.65,60.5 80.65,61.85 81.25,62.45 81.25,64.25 82.15,65.15 82.15,65.45 82.75,65.75 82.75,69.2 83.2,69.65 84.32,69.65 ATMEGA3.28
A8  (via drill 0.5)
  Top 0.305: ATMEGA1.26 12.35,75.76 12.35,77.91 12.18,78.25 11.95,78.52 v11.39,79.33 | v8.55,83.06 8.56,92.39 7.86,92.4 2.48,92.4 JP4.1
  Bottom 0.305: v11.39,79.33 11.39,80.83 9.37,83.06 v8.55,83.06
A11  (via drill 0.5)
  Top 0.305: v9.16,74.22 8.99,74.35 8.99,77.87 9.17,78.05 ATMEGA1.23 | R7.2 12.32,69.02 v12.12,68.45
  Bottom 0.305: JP2.1 1.64,58.43 1.58,58.46 1.58,68.06 2.25,68.77 2.89,68.77 2.89,71 6.48,74.21 v9.16,74.22 9.03,74.13 9.75,74.13 9.79,74.18 9.79,75.67 10.21,76.26 11.29,76.26 11.94,75.56 11.95,68.79 11.93,68.67 v12.12,68.45
A16  (via drill 0.5)
  Top 0.305: v14.28,6.73 14.28,10.6 v14.45,10.77 14.31,10.92 14.31,11.86 13.33,12.84 v13.33,12.97 | v22.77,10.03 21.93,10.79 21.93,11.66 22.78,12.38 24,12.4 27.35,12.41 28.14,12.3 29.97,12.27 30.28,11.95 36.49,11.95 v37.18,12.66
  Bottom 0.305: R30.2 11.71,7.46 12.09,7.08 13.93,7.08 v14.28,6.73 | v14.45,10.77 15.83,10.77 R26.2 19.86,10.5 v22.77,10.03 | v37.18,12.66 35.33,12.66 34.72,13.02 ATMEGA2.24 | LMC662.1 8.9,14.75 9.16,14.6 11.75,14.59 v13.33,12.97
A17  (via drill 0.5)  (1 unrouted)
  Top 0.305: 16.94,29.45 21.7,29.45 25.99,25.16 30.36,29.53 38.58,29.53 38.58,24.09 37.87,23.53 v37.88,20.59 37.89,20.29 37.44,20.29 35.27,20.29 34.33,18.77 34.33,16.74 v34.19,16.68
  Bottom 0.305: ATMEGA2.23 33.09,12.35 32.92,12.51 32.94,13.04 32.99,15.37 33.27,15.35 33.54,15.47 34.08,16.05 v34.19,16.68 | R25.2 38.41,24.12 38.41,24.03 37.87,23.49 v37.88,20.59
A18  (via drill 0.5)
  Top 0.305: v87.38,71.38 87.5,72.72 ATMEGA3.22
  Bottom 0.305: JP8.12 78.78,53.83 81.4,56.45 81.4,69.8 81.85,70.25 86.05,70.25 v87.38,71.38
A19  (via drill 0.5)
  Top 0.305: v89.68,71.45 89.93,71.72 ATMEGA3.19
  Bottom 0.305: JP8.11 80.65,58.1 80.65,69.95 81.7,71 85.85,71 87.05,72.2 87.7,72.2 88.4,71.45 v89.68,71.45
A20
  Top 0.305: JP8.8 78.77,63.87 80.65,65.75 80.65,66.05 81.4,66.5 81.4,69.65 82.9,71.3 84.29,71.3 ATMEGA3.26
A21
  Top 0.305: JP8.7 79.07,66.12 80.65,66.95 80.65,69.95 82.75,72.05 84.32,72.05 ATMEGA3.25
A22
  Top 0.305: JP8.6 79.47,68.62 79.9,69.05 79.9,70.1 83.2,73.4 85.47,73.4 ATMEGA3.24
A23  (via drill 0.5)
  Top 0.305: v85.85,72.16 86.65,72.68 ATMEGA3.23
  Bottom 0.305: JP8.5 79.82,72.12 v85.85,72.16
A28  (via drill 0.5)
  Top 0.305: v39.29,60.02 39.26,61.82 41.71,63.7 44.75,63.7 47.69,66.26 47.69,67.64 49.39,68.84 50.15,68.85 51.39,66.98 51.95,66.98 52.18,66.97 52.49,66.96 54.75,66.95 57.4,66.96 v58.38,68.48 | v58.28,75.22 57.84,75.38 57.84,90.53 54.75,90.53 54.42,90.2 v54.09,90.2
  Bottom 0.305: ATMEGA4.24 v39.29,60.02 | v58.38,68.48 58.27,68.93 58.27,70.68 58.29,71 58.29,74.65 v58.28,75.22 | R49.1 50.03,89.87 53.58,89.87 54.13,90.13 v54.09,90.2
A29  (via drill 0.5)
  Top 0.305: v36.68,59.62 35.93,63.26 34.24,63.88 33.64,63.86 33.14,63.41 32.08,62.99 28.78,62.99 28.19,62.79 27.76,62.68 27.46,61.66 v27.46,59.25
  Bottom 0.305: ATMEGA4.23 38.63,60.4 v36.68,59.62 | v27.46,59.25 26.49,61.26 25.54,62.04 25.52,97.2 65.45,97.1 65.45,91.21 R52.1
AREF1
  Top 0.305: C12.1 10.25,73.37 8.77,73.38 8.46,73.83 8.38,73.96 8.38,74.64 8.43,74.81 8.43,79.71 9.09,80.4 9.97,80.4 ATMEGA1.20
AREF2
  Bottom 0.305: ATMEGA2.20 32.81,9.83 C14.1
AREF3
  Bottom 0.305: ATMEGA328.20 78.52,6.85 C5.1
AREF4
  Top 0.305: C24.1 89.73,75.05 89.26,74.58 ATMEGA3.20
AREF5
  Bottom 0.305: C30.1 38.34,63.53 38.33,63.54 38.89,63.33 37.82,62.55 37.5,62.41 36.53,62.41 36.46,61.41 ATMEGA4.20
D0_RX1  (via drill 0.5)
  Top 0.305: v15.51,78.32 15.57,77.63 15.58,77.4 15.57,75.58 ATMEGA1.30 | R9.2 2.15,85.92 INTERFACE1.3
  Bottom 0.305: v15.51,78.32 15.35,78.32 14.38,78.5 13.92,78.8 13.92,81.37 13.68,81.58 12.67,81.58 9.66,84.52 2.68,84.52 2.68,85.19 INTERFACE1.3
D0_RX2  (via drill 0.5)
  Top 0.305: v39.11,12.71 38.16,12.37 36.86,11.4 35.25,11.42 33.12,11.43 28.9,7.43 28.92,4.02 28.45,4.04 27.04,2.75 24.95,2.73 INTERFACE2.3 25.57,0.28 25.77,0.28 25.77,0.26 33.62,0.28 33.74,0.4 38.23,0.4 38.77,0.82 38.76,1.7 v37.9,2.39
  Bottom 0.305: ATMEGA2.30 39.22,13.42 v39.11,12.71 | R32.2 40.66,2.68 37.98,2.7 v37.9,2.39
D0_RX3  (via drill 0.5)
  Top 0.305: v72.08,4.75 71.62,4.57 70.73,4.59 70.24,5.13 70.25,5.48 70.48,6.21 70.48,10.51 69.22,12.25 69.23,14.13 67.77,14.98 v67.3,14.98 | v76.25,19.67 76.3,20.04 77.1,21.29 77.1,25.09 76.42,25.79 76.42,26.22 76.42,26.3 76.42,28.34 76.42,28.72 63.13,28.72 63.02,28.56 63.02,24.41 63.68,24.41 64.79,24 INTERFACE.3
  Bottom 0.305: v72.08,4.75 71.41,3.91 ATMEGA328.30 | v67.3,14.98 66.41,14.31 65,14.32 63.04,16.63 63.03,22.02 INTERFACE.3 | R14.2 75.81,18.8 75.85,19.1 75.85,19.26 v76.25,19.67
D0_RX4  (via drill 0.5)
  Top 0.305: R36.2 83.97,95.79 INTERFACE3.3 | v85.85,68.2 85.52,68.05 ATMEGA3.30
  Bottom 0.305: INTERFACE3.3 83.9,95.8 83.95,94.7 83.95,92.9 81.85,90.95 81.85,89.15 83.05,87.95 83.35,87.95 92.8,77.6 92.8,71.9 91.15,70.05 87.85,70.05 85.9,68.45 v85.85,68.2
D0_RX5  (via drill 0.5)
  Top 0.305: v35.02,57.22 35.02,56.96 35.03,56.77 35.05,55.06 33.65,55.06 32.2,54.19 32.2,51.7 29.35,49.09 29.36,44.46 30.62,44.46 30.63,42.31 31.55,41.25 31.73,39.91 34.96,39.92 JP10.3 | v37.26,57.06 v39.65,57.11
  Bottom 0.305: v35.02,57.22 35.19,57.05 37.22,57.06 v37.26,57.06 | v39.65,57.11 39.66,55.85 ATMEGA4.30 42.61,55.57 42.61,54.07 42.83,53.6 44.38,53.6 45.34,53.61 R53.2
D1_TX1  (via drill 0.5)
  Top 0.305: v12.36,80.54 15.15,79.92 16.32,78.66 16.33,76.06 ATMEGA1.31 | R15.2 3.91,81.14 INTERFACE1.4
  Bottom 0.305: v12.36,80.54 12.3,81.06 9.36,83.92 2.55,83.92 INTERFACE1.4
D1_TX2  (via drill 0.5)
  Top 0.305: v39.75,11.31 39.04,10.35 | 39.04,10.35 38.82,9.91 38.89,9.4 39.37,8.96 42.89,8.98 42.89,7.34 v44.44,4.15 | 29.56,4.62 29.54,7.05 33.33,10.83 35.83,10.86 37.2,10.86 38.31,10.64 39.04,10.35 | 29.56,4.62 29.57,3.35 28.71,3.37 INTERFACE2.4 | 29.56,4.63 29.56,4.62
  Bottom 0.305: v39.75,11.31 39.9,11.64 40.17,12.47 40.17,14.46 | R33.2 46.06,2.77 45.66,2.76 v44.44,4.15
  Bottom 0.406: ATMEGA2.31 40.17,14.52 40.17,14.46
D1_TX3  (via drill 0.5)
  Top 0.305: INTERFACE.4 64.06,20.08 63.56,20.09 63.55,16.21 65.41,16.21 66.86,16.19 69.8,14.48 69.81,12.42 70.7,11.18 71.08,11.19 71.09,8.55 71.09,6.89 71.08,6.59 71.08,6.6 71.09,6.27 71.07,6.1 v71.08,5.38
  Bottom 0.305: ATMEGA328.31 70.65,3.25 v71.08,5.38 | INTERFACE.4 65.17,19.23 72,19.21 72.01,19.22 72.57,19.22 73.27,18.51 R34.2
D1_TX4  (via drill 0.5)
  Top 0.305: R37.2 86.35,95.18 INTERFACE3.4 | ATMEGA3.31 86.19,67.46 v87.05,68.3
  Bottom 0.305: v87.05,68.3 87.2,68.7 88.05,69.45 91.45,69.45 93.4,71.6 93.4,77.9 83.65,88.55 83.35,88.55 82.45,89.45 82.45,90.65 83.05,91.25 84.85,92.9 86.35,92.9 86.35,95.18 INTERFACE3.4
D1_TX5  (via drill 0.5)
  Top 0.305: v39.69,54.37 38.72,54.37 38.72,44.57 37.83,43.68 JP10.4
  Bottom 0.305: v39.69,54.37 39.91,54.87 40.11,55.03 41.07,55.03 ATMEGA4.31 42.02,55.04 42.04,53.97 42.47,53.03 45.51,53.03 46.96,54.29 47.5,55.27 R54.2
D4
  Bottom 0.305: ATMEGA328.9 69.81,12.43 R2.1
D10  (via drill 0.5)
  Top 0.305: ATMEGA1.12 14.72,82.93 v13.93,82.95 | v9.35,86.92 9.29,86.92 9.29,93.63 JP6.1
  Bottom 0.305: v13.93,82.95 13.91,85.74 9.88,85.74 9.88,86.9 9.35,86.9 v9.35,86.92
D10_SS1  (via drill 0.5)
  Top 0.305: v15.99,87.31 15.17,86.29 13.72,86.28 13.15,85.04 ATMEGA1.14
  Bottom 0.305: v15.99,87.31 19.44,87.31 19.44,91.5 U$6.NSS
D10_SS2  (via drill 0.5)
  Top 0.305: RFM1.NSS 51.59,13.2 52.92,12.19 52.94,6.24 52.32,5.66 48.94,5.68 47.96,3.97 47.16,2.6 44.58,2.57 44.05,3.18 v42.51,6.12
  Bottom 0.305: ATMEGA2.14 37.04,4.89 41.5,4.91 v42.51,6.12
D10_SS3  (via drill 0.5)
  Top 0.305: RFM69.NSS 64.69,3.68 64.69,4.19 65.95,4.24 65.95,5.31 67.4,5.31 67.85,5.31 69.92,2.87 73.9,2.83 74.03,2.93 74.03,7.55 74.33,7.98 74.32,8.38 74.31,9.18 v74.3,9.31
  Bottom 0.305: ATMEGA328.14 73.83,10.71 73.92,9.91 v74.3,9.31
D10_SS4
  Top 0.305: JP9.9 98.65,73.7 95.35,70.4 93.8,70.4 ATMEGA3.14
D10_SS5  (via drill 0.5)
  Top 0.305: U$16.NSS 33.2,55.5 v34.16,55.87
  Bottom 0.305: v34.16,55.87 33.62,56.55 33.62,56.59 33.56,57.81 33.35,58.11 32.51,58.23 ATMEGA4.14
D11
  Top 0.305: JP5.1 2.11,96.13 3.52,94.72 4.83,94.72 5.25,94.3 9.98,94.3 9.98,89.79 17.25,89.79 17.25,85.8 16.89,85.39 15.93,85.39 15.51,85.02 ATMEGA1.11
D11_MOSI1
  Top 0.305: ATMEGA1.15 12.37,85.09 U$4.MOSI
  Bottom 0.305: U$4.MOSI 13.4,87.6 15.78,89.98 17.01,89.98 17.01,91.5 U$6.MOSI
D11_MOSI2
  Top 0.305: RFM1.MOSI 50.32,11.2 49.58,10.19 49.58,8.45 49.59,8.28 48.39,7.81 47.02,6.47 46.49,6.47 U$10.MOSI
  Bottom 0.305: ATMEGA2.15 36.27,5.9 36.27,4.72 36.84,4.32 41.83,4.3 43.71,6.21 45.44,6.23 U$10.MOSI
D11_MOSI3  (via drill 0.5)
  Top 0.305: v73.51,8.16 73.45,7.95 73.46,7.1 73.44,6.28 73.44,3.39 70.17,3.43 68.05,5.92 65.72,5.92 64.33,5.22 RFM69.MOSI | v73.88,12.12 73.66,12.15 73.3,12.15 72.53,12.82 72.53,14.85 72.54,15.16 71.82,16.02 70.75,17.42 70.48,17.79 U$2.MOSI
  Bottom 0.305: v73.51,8.16 74.19,8.18 75.07,8.94 75.05,9.59 74.73,10.04 ATMEGA328.15 74.61,11.11 74.64,11.35 v73.88,12.12
D11_MOSI4  (via drill 0.5)
  Top 0.305: JP9.10 96.25,73.4 96.25,72.65 94.9,71.3 93.84,71.3 ATMEGA3.15 | J4.4 96.03,95.05 94.73,94.13 94.73,81.52 v96.1,80.15
  Bottom 0.305: v96.1,80.15 96.55,79.7 96.55,78.03 JP9.10
D11_MOSI5  (via drill 0.5)
  Top 0.305: v33.98,58.54 33.54,57.69 33.2,57 U$16.MOSI 31.19,55.99 29.94,55.99 29.49,55.69 29.49,50.12 26.84,48.73 U$17.MOSI
  Bottom 0.305: v33.98,58.54 33.14,59.01 ATMEGA4.15
D12  (via drill 0.5)
  Top 0.305: U1.1 17.29,67.26 | 17.29,67.26 15.52,67.27 U1.14 | IC1.8 5.12,55.78 5.84,55.06 8.37,55.06 | 8.37,55.06 17.26,55.06 17.3,55.1 17.3,60.02 | 17.3,60.02 17.3,67.26 17.29,67.26 | U2.3 U2.2 2.9,65.81 3.58,65.13 4.87,65.13 v4.9,65.16 | v6.58,59.3 6.68,59.3 8.53,57.44 8.53,55.22 8.37,55.06 | ATMEGA1.10 16.49,83.15 v17.11,82.89 | v16.46,60.61 17.29,60.61 17.3,60.02
  Bottom 0.305: v4.9,65.16 5.11,65.16 5.11,64.84 5.12,61.2 6.56,59.64 6.56,59.3 v6.58,59.3 | v17.11,82.89 17.21,82.88 18.75,81.33 18.75,79.74 22.62,76.22 22.62,71.82 22.72,71.72 22.72,62.6 20.82,61.17 17.2,61.17 v16.46,60.61
D12_MISO1
  Top 0.305: ATMEGA1.16 11.55,84.87 U$4.MISO
  Bottom 0.305: U$4.MISO 12.28,87.38 15.33,90.68 15.44,90.7
  Bottom 0.406: U$6.MISO 15.44,91.5 15.44,90.7
D12_MISO2
  Top 0.305: 50.47,9.2 RFM1.MISO 52.33,9.24 52.34,9.15 52.34,6.49 52.07,6.23 48.56,6.23 46.69,3.09 45.59,3.09 45.24,3.68 45.24,4.23 46.1,5.19 U$10.MISO
  Bottom 0.305: ATMEGA2.16 35.53,5.87 35.56,4.5 36.48,3.76 42.1,3.78 43.98,5.64 45.48,5.64 U$10.MISO
D12_MISO3  (via drill 0.5)
  Top 0.305: 73.49,10.34 73.49,10.58 73.12,11.48 v71.65,12.7 | 73.49,10.34 75.34,10.34 75.82,10.35 v76.28,10.87 | 73.49,10.34 73.49,10.32 73.49,9.16 72.75,8.53 72.75,7.87 72.94,7.41 72.94,3.96 72.38,3.97 70.43,4.01 68.36,6.41 68.26,6.51 68.15,6.51 65.87,6.51 RFM69.MISO
  Bottom 0.305: v76.28,10.87 75.95,10.96 75.41,10.95 75.43,10.61 ATMEGA328.16 | U$2.MISO 69.2,16.04 71.45,16.04 71.45,13.25 v71.65,12.7
D12_MISO4  (via drill 0.5)
  Top 0.305: JP9.11 98.48,78.78 96.4,76.7 96.4,74.9 95.2,73.7 95.2,72.65 94.6,72.05 93.93,72.05 ATMEGA3.16 | J4.1 93.47,84.01 v93.9,83.6
  Bottom 0.305: v93.9,83.6 94.12,83.45 JP9.11
D12_MISO5  (via drill 0.5)
  Top 0.305: v33.81,59.87 31.98,58.49 U$16.MISO 31.19,57.96 29.81,58.45 28.38,57.32 28.38,56.74 28.88,56.03 28.89,50.56 27.44,49.77 U$17.MISO
  Bottom 0.305: v33.81,59.87 32.68,59.87 ATMEGA4.16
D13  (via drill 0.5)
  Top 0.305: R7.1 9.71,69 v9.71,68.4 | v19.63,84.82 17.13,84.83 ATMEGA1.9
  Bottom 0.305: v9.71,68.4 8.75,67.3 8.73,66.67 7.93,66.11 7.91,64.44 7.92,62.37 8.61,61.72 8.86,61.49 9.61,60.84 15.39,60.84 15.93,59.84 16.84,59.83 17.53,60.61 21.08,60.59 23.33,62.3 23.35,84.81 v19.63,84.82
D13_SCK1
  Top 0.305: ATMEGA1.17 10.02,84.82 U$4.CLK
  Bottom 0.305: 13.44,91.16 13.47,90.68 13.47,89.97 U$4.CLK
  Bottom 0.406: U$6.SCK 13.44,91.5 13.44,91.16
D13_SCK2
  Top 0.305: RFM1.SCK 48.74,7.29 47.6,6.17 47.22,5.79 47.09,5.68 47.09,4.89 46.82,4.51 46.53,4.24 U$10.CLK
  Bottom 0.305: 33.73,7.32 33.83,7.43 ATMEGA2.17 34.74,6.88 34.74,4.52 36.19,3.21 42.43,3.23 43.25,4.05 44.25,5.06 45.21,5.05 U$10.CLK
D13_SCK3  (via drill 0.5)
  Top 0.305: v69.72,8.17 68.9,8.65 68.54,8.65 66.05,8.65 65.22,9.21 64.34,9.21 RFM69.SCK 64.1,9.35
  Bottom 0.305: v69.72,8.17 70.47,7.4 72.34,7.4 74.25,7.39 75.75,8.84 75.98,9.24 ATMEGA328.17 76.91,10.04 77.09,10.68 77.01,11.26 76.57,11.73 75.72,11.73 74.26,12.9 74.26,12.92 73.5,12.94 72.32,11.76 70.84,11.76 70.84,15.45 68.59,15.45 68.59,17.35 U$2.CLK
D13_SCK4
  Top 0.305: JP9.12 98.62,81.32 96.4,79.1 96.4,77.6 95.8,77 95.8,75.35 94.15,73.7 92.47,73.7 ATMEGA3.17 | J4.3 96.78,92.75 R38.1
  Bottom 0.305: JP9.12 98.75,90.76 99.93,92.45 99.93,94.6 97.85,94.6 J4.3
D13_SCK5  (via drill 0.5)
  Top 0.305: v33.04,60.81 32.44,59.96 32.05,59.95 31.2,59.98 U$16.SCK 31.2,59.97 29.64,59.53 29.44,58.96 27.83,57.61 27.81,56.49 28.33,55.8 28.31,50.96 27.29,50.38 U$17.CLK
  Bottom 0.305: ATMEGA4.17 33.42,61.02 v33.04,60.81
D14  (via drill 0.5)
  Top 0.305: ATMEGA1.2 17.68,78.05 v17.13,77.3 | U1.11 13.4,69.39 13.39,68.33 13.37,68.3 v13.16,67.93 | R8.2 2.86,76.93 JP1.4 | v10.59,75.41 10.55,76.27 11.52,77.19 11.53,77.43 v11.52,77.77
  Bottom 0.305: v17.13,77.3 17.12,76.47 16.71,75.99 13.28,75.99 11.63,77.51 | 11.63,77.51 2.96,77.49 1.98,77.78 JP1.4 | v13.16,67.93 13.16,67.9 12.92,67.67 11.29,67.69 11.29,70.4 11.31,74.19 11.32,75.27 v10.59,75.41 | 11.63,77.51 v11.52,77.77
D15  (via drill 0.5)
  Top 0.305: ATMEGA1.1 18.63,76.7 v18.92,76.3 | U1.9 13.88,70.38 v13.55,70.12 | R8.1 2.04,75.29 JP1.3
  Bottom 0.305: JP1.3 2.79,76.95 5.3,76.97 8.73,76.97 11.46,76.94 13,75.44 | 13,75.44 16.86,75.43 17.84,76.24 18.42,76.22 v18.92,76.3 | v13.55,70.12 12.54,70.58 12.54,70.94 12.54,74.68 12.75,75.03 13,75.44
D16  (via drill 0.5)
  Top 0.305: v18.15,75.41 17.86,75.52 ATMEGA1.32
  Bottom 0.305: 19.44,72.09 19.48,72.13 19.46,73.35 v18.15,75.41
  Bottom 0.406: 19.44,72.09 19.44,72 U$6.DIO0 U$7.WIFI_EN
D17
  Bottom 0.305: ATMEGA2.13
D19  (via drill 0.5)
  Top 0.305: v37.77,7.29 37.79,6.86 36.01,4.87 35.79,4.67 34.21,4.66 33.28,4.65 v30.98,3.77
  Bottom 0.305: ATMEGA2.11 39.32,6.62 38.95,7.01 38.61,7.32 v37.77,7.29 | v30.98,3.77 29.82,3.77 27.16,3.77 17.59,3.76 17.39,3.77 11.48,3.77 10.54,4.08 9.84,5.06 9.15,5.98 R29.2
D20  (via drill 0.5)
  Top 0.305: v36.56,7.3 35.91,6.66 v33.94,6.26
  Bottom 0.305: ATMEGA2.10 40.23,6.55 40.24,6.62 38.57,8.09 38.34,8.11 36.72,8.13 v36.56,7.3 | R23.1 34.61,2.3 34.14,4.24 34.14,6.27 v33.94,6.26
D21  (via drill 0.5)
  Top 0.305: v30.98,5.64 30.99,6.81 32.76,8.52 32.99,8.68 35.39,8.68 36.49,8.68 v36.73,9.02
  Bottom 0.305: v36.73,9.02 36.83,8.98 36.87,8.94 37,8.67 37.4,8.67 38.81,8.65 40.57,7.13 41.05,7.13 41.07,6.28 ATMEGA2.9 | R21.1 23.68,5.34 23.96,5.8 24.76,6.39 27.13,6.37 27.85,5.66 29.67,5.65 v30.98,5.64
D22  (via drill 0.5)
  Top 0.305: v40.81,11.85 42.42,11.86 43.04,12.72 43.71,13.79 43.99,13.79 45,13.79 48.05,13.8 48.05,16.56 v50.9,16.57
  Bottom 0.305: ATMEGA2.2 41.45,12.23 v40.81,11.85 | R31.1 51.88,20.69 51.25,20.21 51.25,17.1 v50.9,16.57
D23  (via drill 0.5)
  Top 0.305: v42,14 41.49,14 41.09,14.12 39.71,14.14 36.73,14.16 36.29,14.13 35.57,14.86 33.24,14.86 30.53,14.88 29.7,14.14 29.37,13.86 29.07,13.59 JP7.2
  Bottom 0.305: ATMEGA2.1 42.53,13.55 v42,14
D24  (via drill 0.5)
  Top 0.305: RFM1.DIO0 32.39,12.59 35.78,12.59 36.31,13.49 40.05,13.5 | 40.05,13.5 40.12,13.37 40.63,13.16 v41.07,13.13 | U$12.WIFI_EN 35.02,3.65 35.25,3.88 40.27,3.86 42.29,0.97 43.52,0.96 43.53,1.52 43.53,2 43.36,2.18 42.83,2.82 41.63,4.99 41.04,5.58 38.15,9.34 v37.98,9.95 | v38.2,11.43 40.05,12.31 40.05,13.5
  Bottom 0.305: v41.07,13.13 41.07,14.48 ATMEGA2.32 | v37.98,9.95 v38.2,11.43
D27  (via drill 0.5)
  Top 0.305: 83.78,3.17 RFM69.DIO0 84.15,3.13 v82.73,3.19 | U$9.WIFI_EN 67.28,1.83 v67.25,1.83 67.88,1.83 68.89,2.24 69.69,2.25 74.51,2.26 74.66,2.26 74.66,3.13 79.99,3.16 v81.19,3.16
  Bottom 0.305: v67.25,1.83 67.84,1.81 69.35,2.44 69.76,2.43 69.84,2.2 69.81,2.18 ATMEGA328.32 | v82.73,3.19 82.55,3.17 v81.19,3.16
D28
  Top 0.305: JP9.8 98.21,71.16 96.7,69.65 93.72,69.65 ATMEGA3.13
D29
  Top 0.305: JP9.7 95.03,68.62 94.9,68.75 93.03,68.75 ATMEGA3.12
D30
  Top 0.305: JP9.6 96.52,66.08 94.6,68 93.83,68.01 ATMEGA3.11
D31
  Top 0.305: JP9.5 98.01,63.54 94.3,67.25 93.9,67.26 ATMEGA3.10
D32
  Top 0.305: JP9.4 98.45,61 96.25,63.05 96.25,64.25 94.04,66.49 93.82,66.5 ATMEGA3.9
D33  (via drill 0.5)
  Top 0.305: JP9.3 97.54,58.46 95.65,60.2 95.5,60.35 v92.8,60.35 | v87,66.35 86.75,65.9 86.75,65.44 ATMEGA3.2
  Bottom 0.305: v92.8,60.35 v87,66.35
D34  (via drill 0.5)
  Top 0.305: ATMEGA3.1 85.95,66.2 86.15,66.7 87.8,67.85 89.25,67.85 89.25,70.25 88.75,71 v88.75,72.2
  Bottom 0.305: v88.75,72.2 87.85,73.7 JP8.4
D35  (via drill 0.5)
  Top 0.305: v84.4,65 84.4,66.4 ATMEGA3.32
  Bottom 0.305: JP8.3 78.56,76.24 80.5,74.3 88.15,74.3 90.48,71.9 90.47,71.02 89.97,70.67 87.65,70.65 86.05,69.35 84.4,69.35 v84.4,65 84.55,64.85 84.55,52.55 81.55,49.4 81.55,38.9 80.88,37.48 U$14.WIFI_EN
D37  (via drill 0.5)
  Top 0.305: v31.9,70.58 30.15,71.31 28.1,72.33 26.02,71.33 26.02,67.86 26.01,64.26 v26.28,62.84 | v28.24,60.39 29.46,61.95 v33.03,61.99
  Bottom 0.305: R48.1 31.74,72.71 31.73,70.83 31.8,70.76 v31.9,70.58 | v26.28,62.84 26.85,61.77 v28.24,60.39 | v33.03,61.99 31.55,60.48 31.56,56.76 ATMEGA4.12
D38  (via drill 0.5)
  Top 0.305: v26.3,72.41 25.49,71.97 25.47,67.27 25.45,65.27 25.47,61.45 25.98,60.94 v25.92,60.75 | v31.19,77.67 31.14,79.99 v31.48,80.01 | v27.02,56.78 27.02,57.97 v26.3,59.25
  Bottom 0.305: ATMEGA4.11 31.81,55.84 30.43,54.89 26.73,54.9 26.73,56.49 v27.02,56.78 | v26.3,72.41 26.78,73.3 27.45,73.5 30.23,76.88 30.9,77.66 v31.19,77.67 | v31.48,80.01 32.46,80.01 R47.1 | v26.3,59.25 26.06,59.55 v25.92,60.75
D39
  Bottom 0.305: ATMEGA4.10 31.88,55.06 30.63,54.27 26.19,54.29 26.2,55.47 26.21,55.88 26.2,56.11 26.21,56.96 26.48,57.51 26.74,57.58 27.79,57.69 28.84,58.49 29.46,58.47 30.09,59.73 R46.1
D40  (via drill 0.5, 0.6)
  Top 0.305: v48.03,54.42 49.63,55.53 51.1,55.52 57.45,58.98 63.2,62.14 63.2,64.53 65.56,66.42 v65.55,70.44
  Bottom 0.305: R51.1 73.88,84.02 72.67,82.82 72.32,82.82 71.17,81.67 71.17,79.46 70.6,78.53 68.04,78.53 65.67,76.8 65.67,74.69 65.43,73.55 65.39,71.48 v65.55,70.44 | ATMEGA4.2 38.79,51.79 38.95,51.69 40.13,51.69 40.8,52.43 45.77,52.42 46.54,53.15 47.03,53.54 v48.03,54.42
D41  (via drill 0.5)
  Top 0.305: v40.65,60.89 40.65,62.01 41.99,63.02 43.16,63.02 45,63.03 46.03,63.93 47.73,65.38 48.47,66.05 48.48,67.18 v49.69,68.04
  Bottom 0.305: ATMEGA4.1 39.59,53.56 38.8,53.93 38.8,57.8 38.8,58.06 38.79,58.09 38.8,59.08 40.08,59.1 40.08,59.55 40.08,60.33 v40.65,60.89 | v49.69,68.04 49.47,68.24 49.48,70.3 49.48,73.95 49.48,74.02 49.45,75.1 48.41,75.1 R50.1
D42  (via drill 0.5)
  Top 0.305: U$16.DIO0 49.33,53.97 48.21,53.61 45.43,53.61 43.64,53.62 42.72,53.62 v41.43,53.27 41.78,53.28 39.77,53.28 39.34,52.85 39.34,44.17 38.9,43.7 v38.9,42.55 | U$18.WIFI_EN 28.56,65.96 27.96,65.07 27.02,65.06 26.72,64.68 26.73,63.45 27.1,63.06 26.57,60.18 25.53,59.79 25.53,51.76 25.88,51.41 26.74,51.41 v26.89,51.21 | v27.27,47.92 27.28,46.54 25.85,45.16 25.85,44.45 v26.2,44.11
  Bottom 0.305: v41.43,53.27 ATMEGA4.32 | v26.89,51.21 26.89,48.51 v27.27,47.92 | v26.2,44.11 26.2,44.09 26.65,43.65 | 26.65,43.65 | 26.65,43.65 26.94,43.51 35.87,43.53 36.84,42.54 v38.9,42.55
D43
  Bottom 0.305: R45.1 30.97,53.41 30.99,53.67 31.78,54.19 ATMEGA4.9
FB1
  Bottom 0.305: R20.1 6.51,33.55 6.48,33.52 6.48,31.94 R19.2 6.67,31.07 6.32,31.07 6.32,28.72 6.33,26.81 5.65,25.53 LNK1.FB
FB2
  Bottom 0.305: LNK.FB 82.72,21.63 R13.1 R12.2
GND1  (via drill 0.5)  (1 unrouted)
  Top 0.305: ATMEGA1.5 19.86,80.45 20.04,80.89 | ATMEGA1.3 19.56,78.85 19.71,78.31 19.71,75.81 v19.4,75.11 | U1.7 16,69.91 | 16,69.91 v16.04,69.41 16.04,68.9 U1.12 | U1.10 16,69.91 | X3.2 21.65,75.67 21.51,75.77 21.51,77.78 21.53,77.81 21.68,78.01 v22.1,78.06 | v20.69,69.43 20.7,69.94 18.94,70.79 18.47,70.38 18.17,70.4 U1.5 | 14.16,72.4 14.27,71.87 C13.2 | 14.56,67.35 14.01,67.47 13.92,68.36 | 14.7,68.91 13.88,68.91 | IC1.6 IC1.5 | IC1.4 0.89,61.68 1.57,62.36 | 9.16,72.61 9.28,72.61 9.56,72.89 13.4,72.89 | 5.25,59.32 4.81,59.51 3.46,59.51 | 1.8,79.33 0.46,79.35 0.46,73.01 2.55,73.01 | 12.28,79.67 11.47,80.22 10.8,79.9 ATMEGA1.21
  Bottom 0.305: v19.4,75.11 20.1,75.15 20.5,74.78 20.5,70.71 v20.69,69.43
  Bottom 0.406: 8.67,55.91 8.55,55.91 7.54,55.18 4.43,55.18 3.27,56.21 | 9.16,72.61 9.6,72.31 U$7.WIFI_GND
  other vias: 4.59,73.71 17.11,78.93 17.2,80.58 15.54,80.7 13.06,79.53 12.66,82.94 5.88,91.55 4.64,87.45 15.56,65.25 18.23,65.24 18.24,63.28 15.56,63.28 2.82,64.39 13.71,74.01 7.77,66.96 2.68,67.07 8.79,69.3 5.76,72.41 15.57,82.95 18.28,89.14 20.42,89.14 6.75,87.86 7.17,83.02 21.25,83.81 21.8,56.21 12.28,55.97 5.47,95.29 16.24,88.94 15.92,57.78 11.93,57.81
  pour Top: 23.35,97.21 23.44,54.67 0.49,54.62 0.47,97.25
  pour Bottom: 23.42,54.72 0.52,54.6 0.45,97.23 23.36,97.16
GND2  (via drill 0.5)